# EAGLE board big7segment (EAGLE 6.5.0)
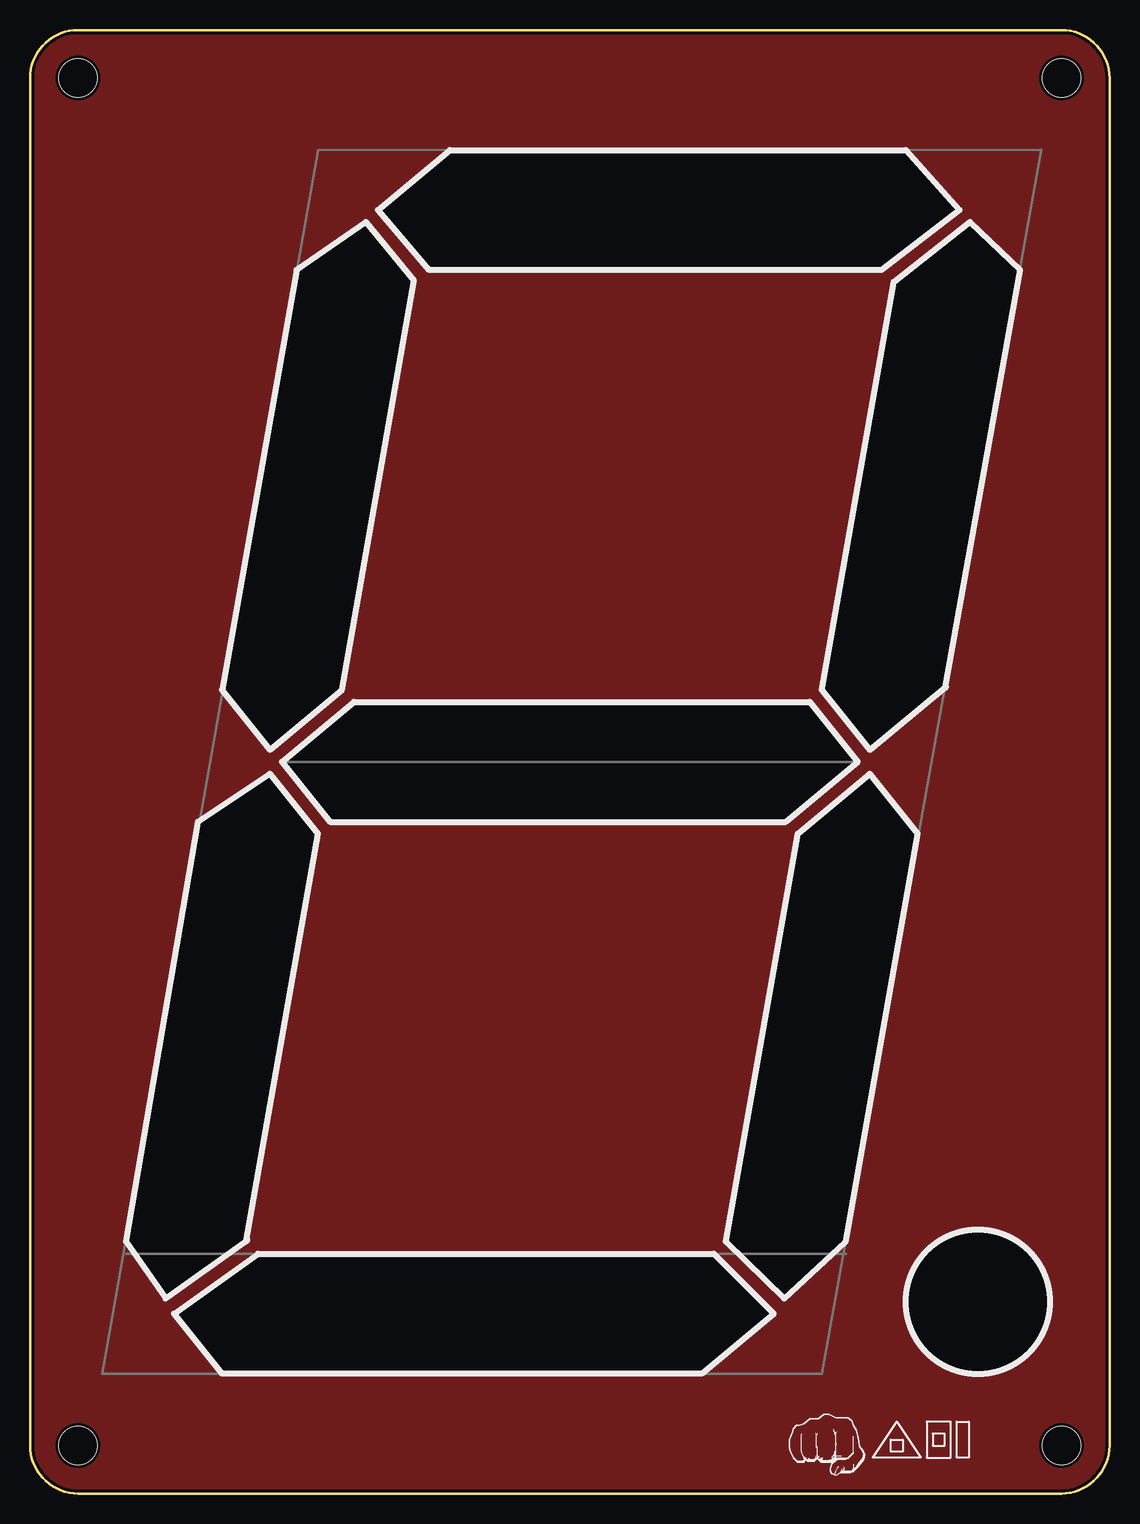
[diagram p0: board, top side]
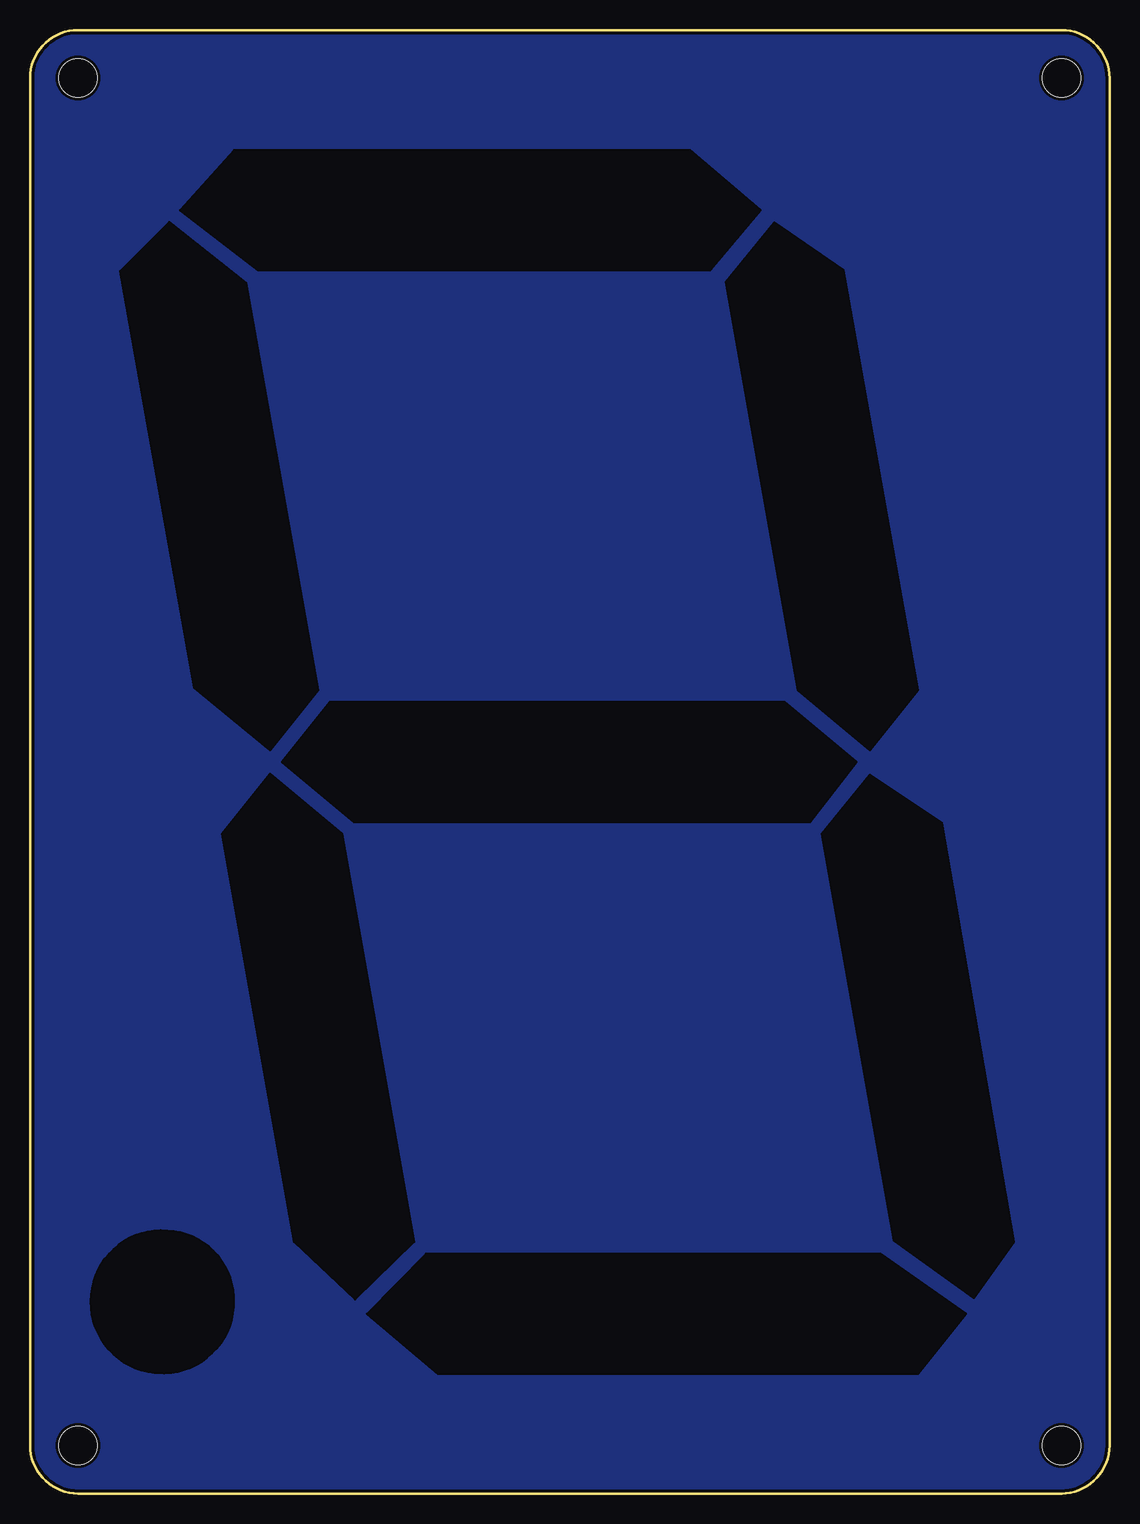
[diagram p1: board, bottom side, seen from below]

Size 90 x 122 mm. Coordinates in mm from the lower left corner, seen from the top.
Outline: 4,122 86,122 arc-90 90,118 90,4 arc-90 86,0 4,0 arc-90 0,4 0,118 arc-90 4,122
Copper layers (1*16): Top 0.035mm / dielectric 1.5mm / Bottom 0.035mm
Design rules "SeeedStudio_2layer_DRU_no_angle_20140221 *": minimum track width 6mil, minimum drill 12mil, track to track 6mil, track to pad 6mil, pad to pad 6mil, via to via 6mil, smd to smd 0mil, copper to edge 10mil, drill to drill 10mil, minimum pad ring 10mil, minimum via ring 6mil, stop-mask expansion 2mil, vias tented up to drill 20mil, thermal gap 8mil
Holes 3.2 mm at 4,118 86,118 86,4 4,4

## Placement (x,y rotation side)
U$1  [ADILOGO]  71,3 0 top

## Library data of the parts
U$1 = adilogo

## Tracks (layer width: path | path; a pad name or v marks a point on that pad's centre or on a via)
GND
  pour Bottom: 4,0 arc-90 0,4 0,117 0,118 arc-90 4,122 86,122 arc-90 90,118 90,4 arc-90 86,0
  pour Top: 4,0 arc-90 0,4 0,118 arc-90 4,122 86,122 arc-90 90,118 90,4 arc-90 86,0
N$1
  cutout Top: 29.11,107 35,112 73,112 77.5,107 71,102 33.3,102
  cutout Bottom: 29.11,107 35,112 73,112 77.5,107 71,102 33.3,102
N$2
  cutout Top: 27.94,105.94 22.2,102 16,67 20,62 26,67 32,101
N$3
  cutout Top: 21.1,61 27.1,66 65,66 69,61 63,56 25,56
N$4
  cutout Top: 20,59.9 14,55.9 8,21 11.3,16.3 18,21.1 24,55
N$5
  cutout Top: 19.1,20 12,15 16,10 56,10 61.9,15 57,20
N$6
  cutout Top: 62.9,16.2 68,21 74,55 70,60 64,55 58,21
N$7
  cutout Top: 70,62 76.3,67.2 82.5,101.9 78.4,106 72,100.9 66,67
N$8
  cutout Bottom: 27.94,105.94 22.2,102 16,67 20,62 26,67 32,101
N$9
  cutout Bottom: 21.1,61 27.1,66 65,66 69,61 63,56 25,56
N$10
  cutout Bottom: 20,59.9 14,55.9 8,21 11.3,16.3 18,21.1 24,55
N$11
  cutout Bottom: 19.1,20 12,15 16,10 56,10 61.9,15 57,20
N$12
  cutout Bottom: 62.9,16.2 68,21 74,55 70,60 64,55 58,21
N$13
  cutout Bottom: 70,62 76.3,67.2 82.5,101.9 78.4,106 72,100.9 66,67
N$14
  cutout Top: 78.56,21.91 arc90 73.03,15.88 73.03,15.56 arc90 79.34,10.04 79.61,10.06 arc90 84.89,16.57 arc90
N$15
  cutout Bottom: 78.56,21.91 arc90 73.03,15.88 73.03,15.56 arc90 79.34,10.04 79.61,10.06 arc90 84.89,16.57 arc90